# Allegro board pcb.brd
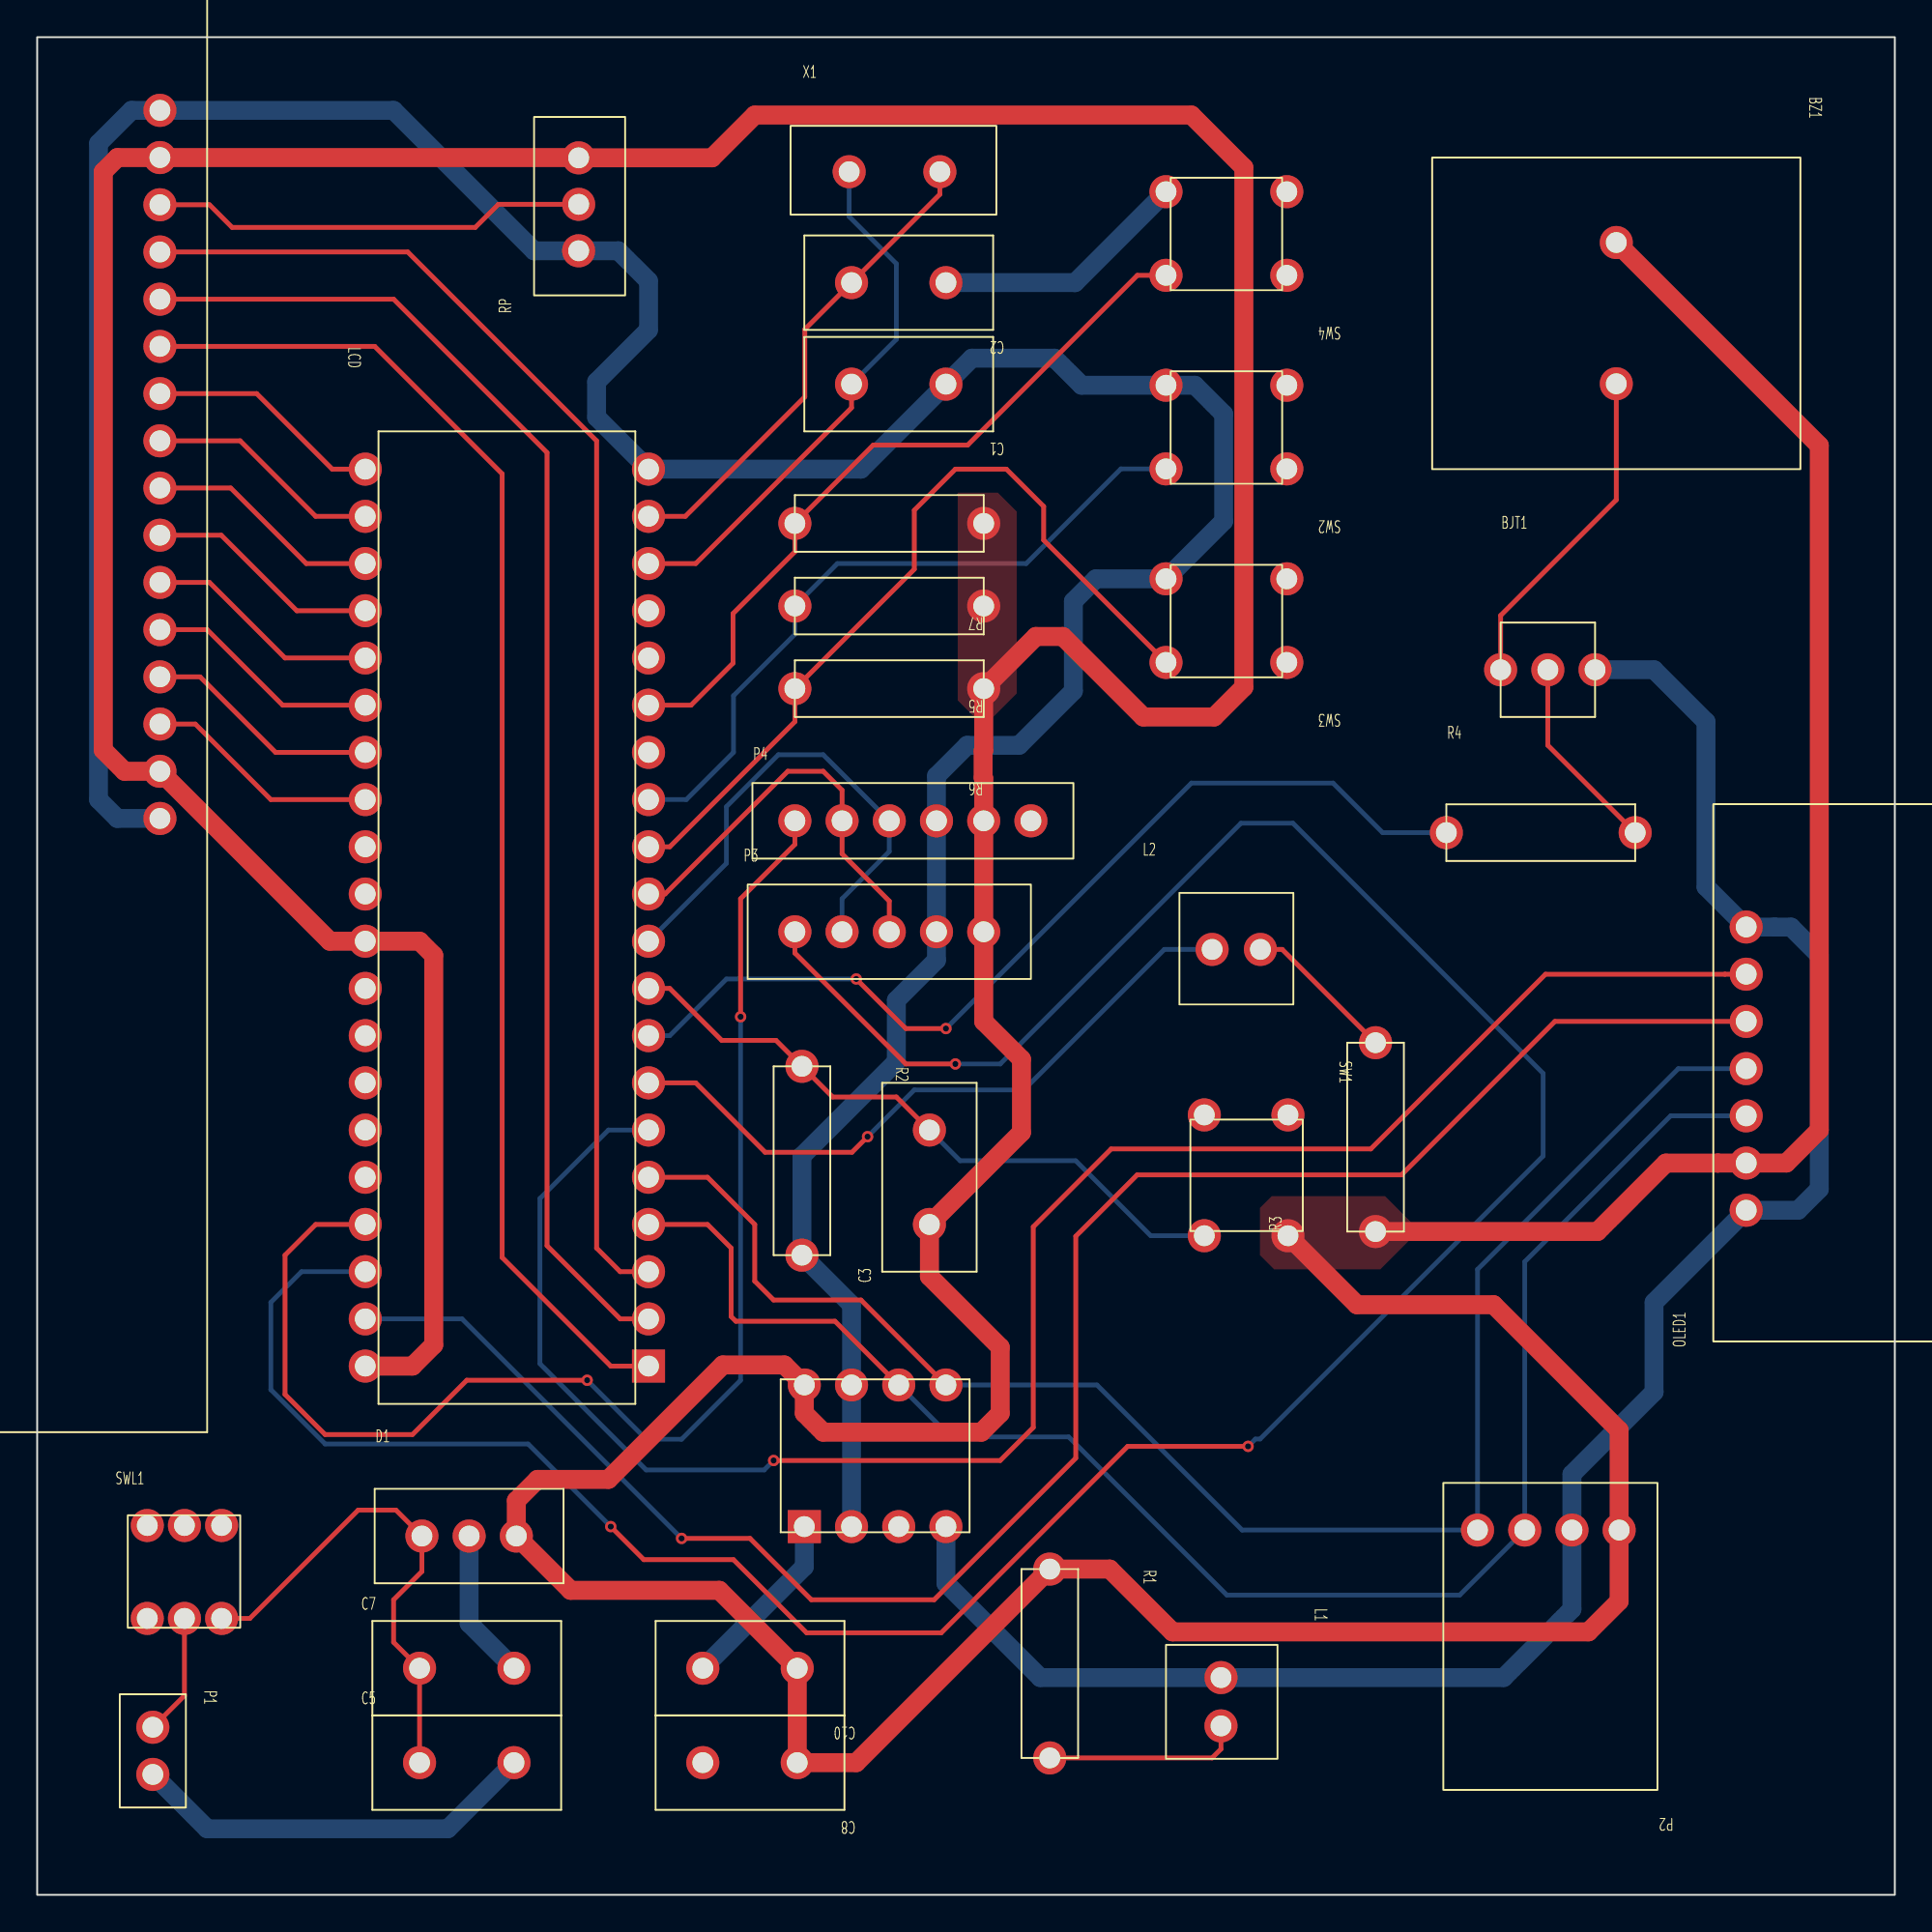
[diagram p0: board, top side]
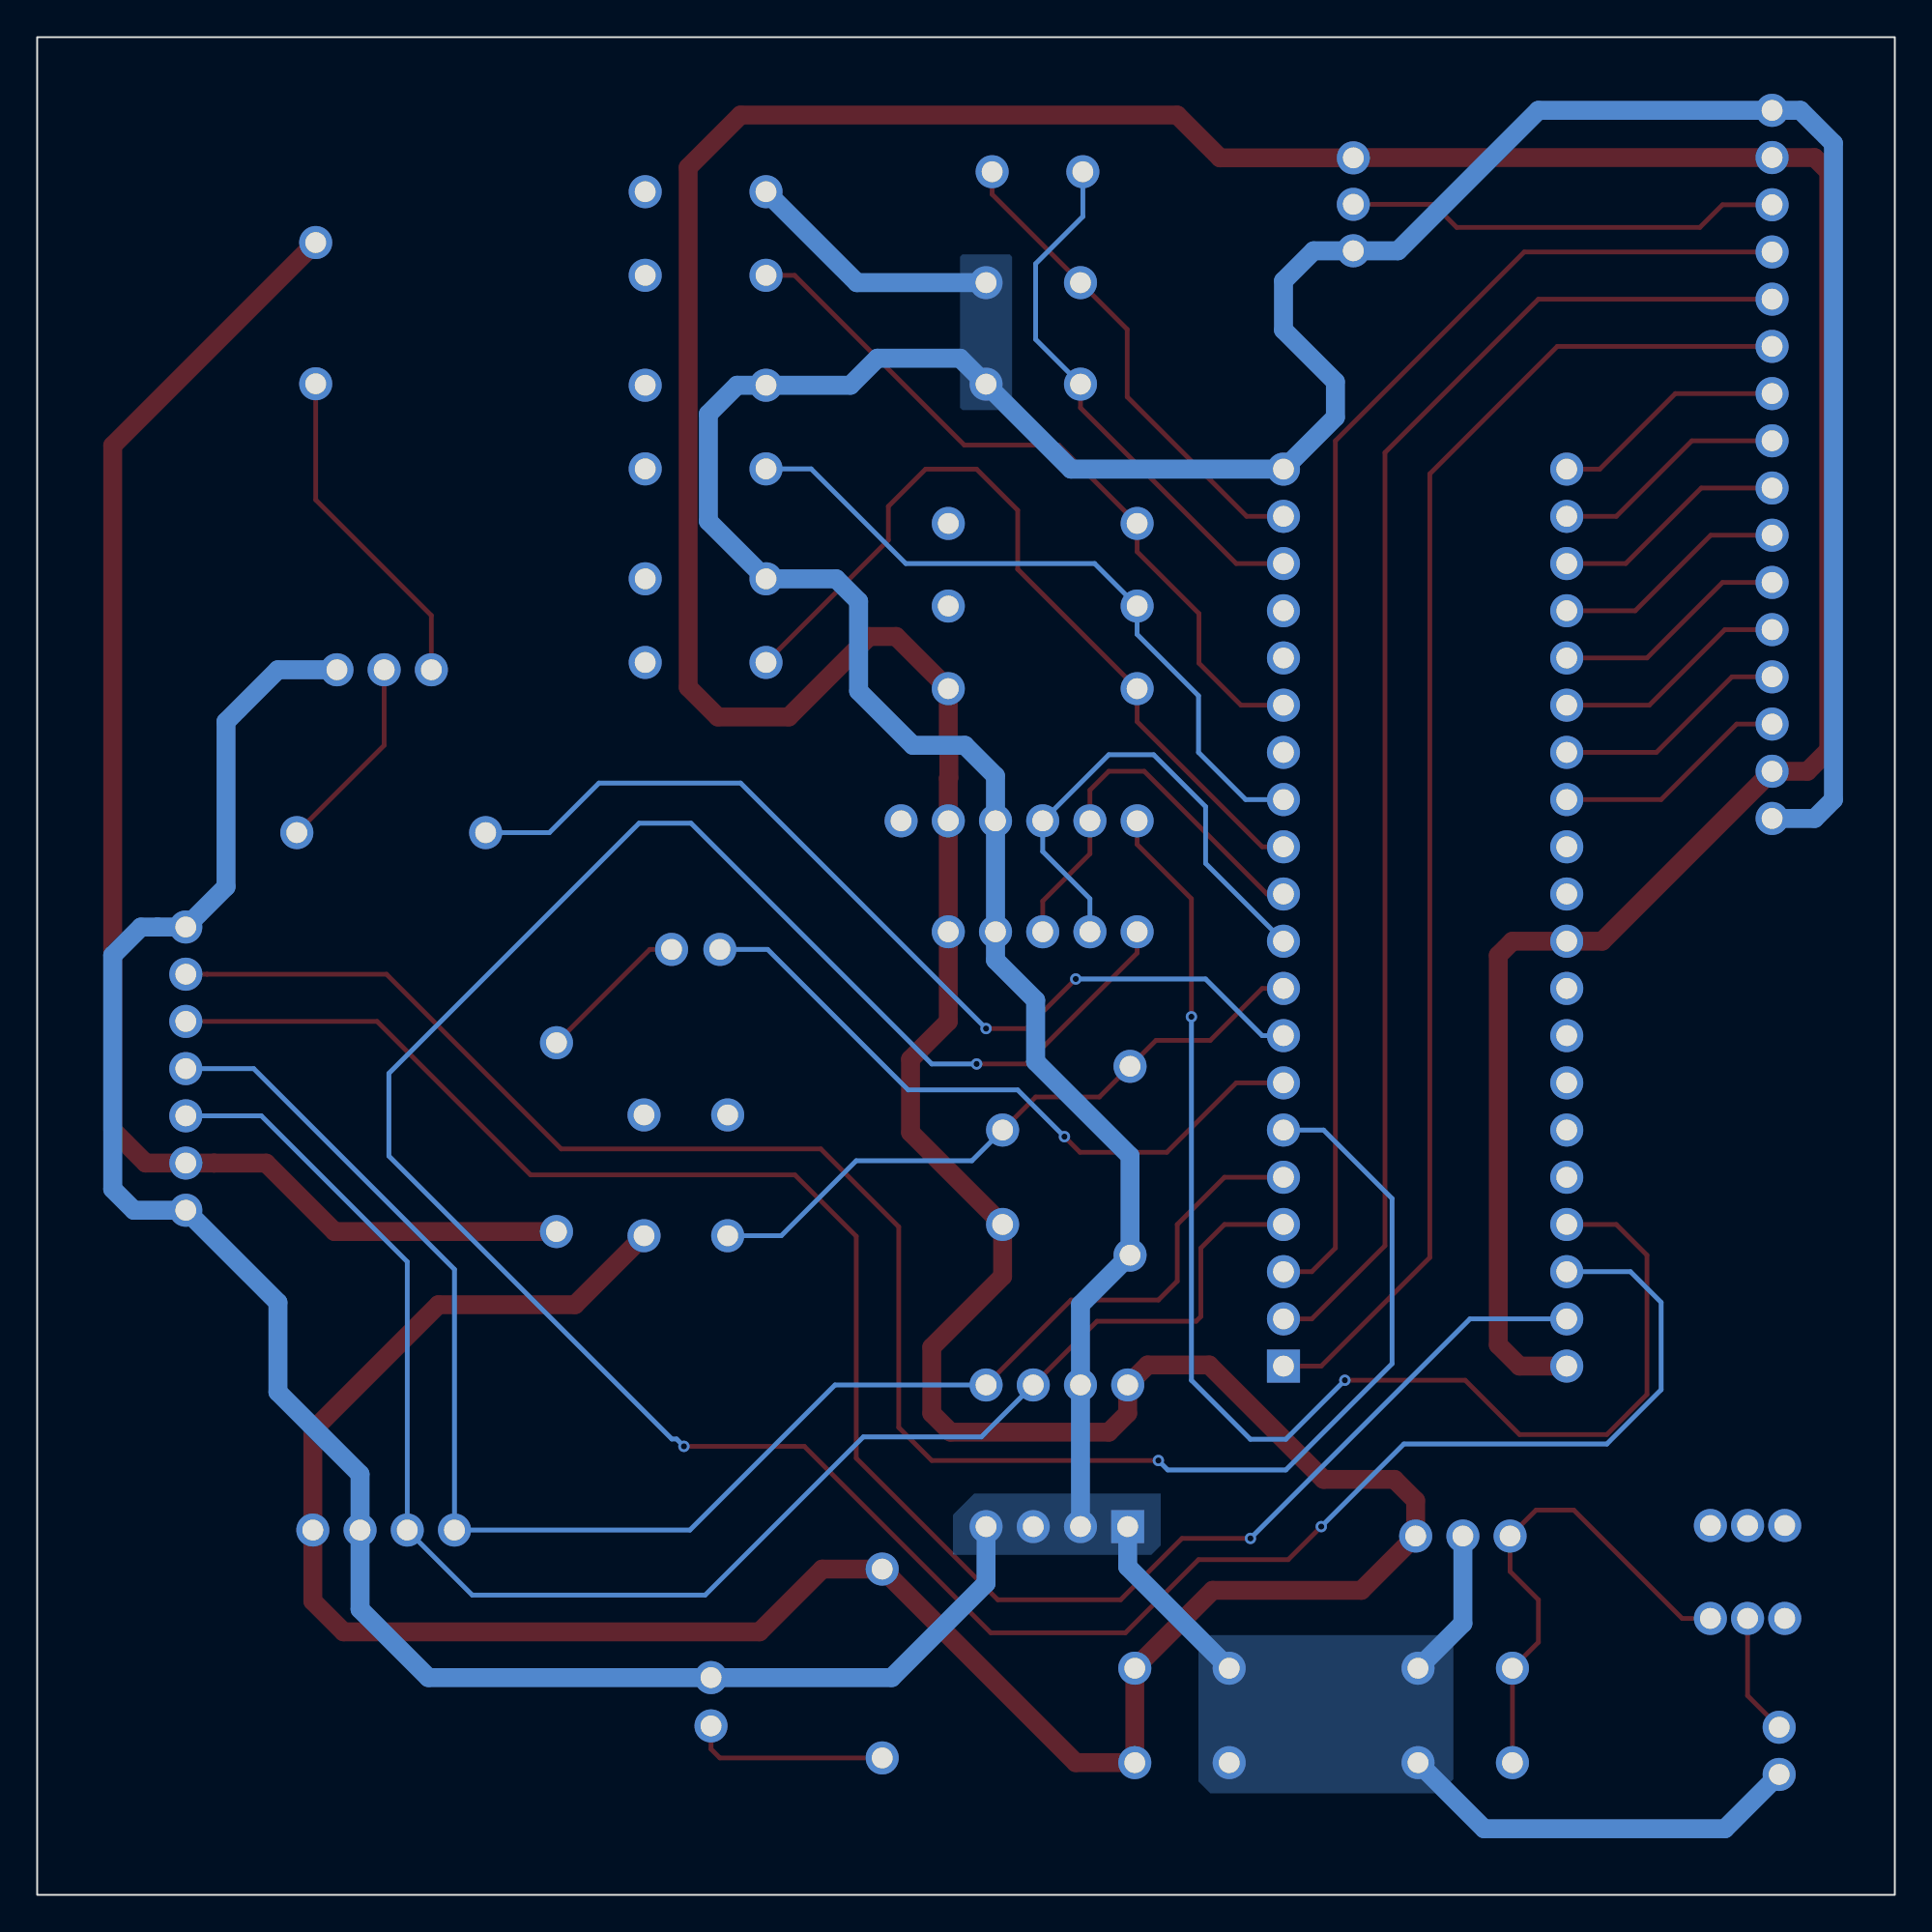
[diagram p1: board, bottom side, seen from below]

Outline 99.95 x 99.95 mm; copper layers: TOP, BOTTOM. Coordinates in mm from the lower left corner of the outline.
Outline path: rectangle 0,0 99.95,99.95

## Design rules (mm)
constraint set DEFAULT: min track width 0.127

## Placement (name value [footprint] x y rotation side)
AT1  -  [AT24C02]  45.08 23.62 90 top
BJT1  -  [BJT_PNP]  -139.7 -254.13 0 top
BZ1  -  [BUZZ]  84.96 85.09 270 top
C1  -  [CAPACITANCE]  46.35 81.28 180 top
C2  -  [CAPACITANCE]  46.35 86.74 180 top
C3  -  [CAPACITANCE]  48.01 38.61 90 top
C5  -  [CAPACITANCE]  23.11 7.11 0 top
C7  -  [CAPACITANCE]  23.11 12.19 0 top
C8  -  [CAPACITANCE]  38.35 7.11 180 top
C10  -  [CAPACITANCE]  38.35 12.19 180 top
D1  -  [L7805]  0.38 11.68 0 top
L1  -  [LED]  63.69 10.38 270 top
L2  -  [LED]  64.53 50.87 0 top
LCD  -  [LCD1602]  4.06 78.23 270 top
OLED1  -  [OLED]  104.93 44.32 90 top
P1  -  [SOCKET2]  6.22 7.75 270 top
P2  -  [MLX90614]  81.34 15.79 180 top
P3  -  [SOCKET5]  45.85 51.82 0 top
P4  -  [SOCKET6]  47.12 57.78 0 top
R1  -  [RESISTOR]  54.48 12.45 270 top
R2  -  [RESISTOR]  41.15 39.5 270 top
R3  -  [RESISTOR]  72.01 40.77 90 top
R4  -  [RESISTOR]  80.9 57.15 0 top
R5  -  [RESISTOR]  45.85 69.34 180 top
R6  -  [RESISTOR]  45.85 64.9 180 top
R7  -  [RESISTOR]  45.85 73.79 180 top
RP  -  [POTENTIOMETER]  29.13 90.96 90 top
SW1  -  [SWITCH]  65.1 38.66 270 top
SW2  -  [SWITCH]  63.94 78.92 180 top
SW3  -  [SWITCH]  63.94 68.51 180 top
SW4  -  [SWITCH]  63.94 89.34 180 top
SWL1  -  [SWITCH_LOCK]  7.92 17.42 0 top
U1  -  [DIP-40-100-600]  25.27 52.58 180 top
X1  -  [CRYSTAL]  46.23 92.71 0 top

## Library data of the parts
AT1 = AT24C02: part number: AT24C02-43010006,AT24C02
BJT1 = BJT_PNP: part number: BJT_PNP-15050001,BJT_PNP
BZ1 = BUZZ: part number: BUZZ-43010005,BUZZ
C1 C2 = CAPACITANCE: part number: CAPACITANCE-08070002,30P
C3 C5 C10 = CAPACITANCE: part number: CAPACITANCE-08070001,10U
C7 C8 = CAPACITANCE: part number: CAPACITANCE-08070004,0.1U
D1 = L7805: part number: L7805-43010004,L7805
L1 L2 = LED: part number: LED-15020001,LED
LCD = LCD1602: part number: LCD1602-15020001,LCD1602
OLED1 = OLED: part number: OLED-43010001,OLED
P1 = SOCKET2: part number: SOCKET2-14050003,SOCKET2
P2 = MLX90614: part number: MLX90614-43020001,MLX90614
P3 = SOCKET5: part number: SOCKET5-14050001,SOCKET5
P4 = SOCKET6: part number: SOCKET6-14050002,SOCKET6
R1 R3 = RESISTOR: part number: RESISTOR-07010004,330
R2 = RESISTOR: part number: RESISTOR-07010003,10K
R4-R7 = RESISTOR: part number: RESISTOR-07010001,1K
RP = POTENTIOMETER: part number: POTENTIOMETER-07080001,POTENTIOMETER
SW1-SW4 = SWITCH: part number: SWITCH-16100002,SWITCH
SWL1 = SWITCH_LOCK: part number: SWITCH_LOCK-16050001,SWITCH_LOCK
U1 = STC89C52: part number: STC89C52-41020001,STC89C52
X1 = CRYSTAL: part number: CRYSTAL-12010001,12.000MHZ

## Footprints (pads in the part's own frame, mm; a bottom-side part is the same pattern mirrored in y, then rotated)
AT24C02
  rect 1.778x1.778 hole 1.118: 1(-3.81,3.81)
  round 1.778 hole 1.118: 2(-3.81,1.27) 3(-3.81,-1.27) 4(-3.81,-3.81) 5(3.81,-3.81) 6(3.81,-1.27) 7(3.81,1.27) 8(3.81,3.81)
BJT_PNP
  round 1.778 hole 1.118: 1(218.44,320.04) 2(220.98,320.04) 3(223.52,320.04)
BUZZ
  round 1.778 hole 1.118: 1(-3.81,0) 2(3.79,0)
CAPACITANCE
  round 1.778 hole 1.118: 1(-2.54,0) 2(2.54,0)
CRYSTAL
  round 1.778 hole 1.118: 1(-2.54,0) 2(2.34,0)
DIP-40-100-600
  rect 1.778x1.778 hole 1.118: 1(-7.62,24.13)
  round 1.778 hole 1.118: 2(-7.62,21.59) 3(-7.62,19.05) 4(-7.62,16.51) 5(-7.62,13.97) 6(-7.62,11.43) 7(-7.62,8.89) 8(-7.62,6.35) 9(-7.62,3.81) 10(-7.62,1.27) 11(-7.62,-1.27) 12(-7.62,-3.81) 13(-7.62,-6.35) 14(-7.62,-8.89) 15(-7.62,-11.43) 16(-7.62,-13.97) 17(-7.62,-16.51) 18(-7.62,-19.05) 19(-7.62,-21.59) 20(-7.62,-24.13) 21(7.62,-24.13) 22(7.62,-21.59) 23(7.62,-19.05) 24(7.62,-16.51) 25(7.62,-13.97) 26(7.62,-11.43) 27(7.62,-8.89) 28(7.62,-6.35) 29(7.62,-3.81) 30(7.62,-1.27) 31(7.62,1.27) 32(7.62,3.81) 33(7.62,6.35) 34(7.62,8.89) 35(7.62,11.43) 36(7.62,13.97) 37(7.62,16.51) 38(7.62,19.05) 39(7.62,21.59) 40(7.62,24.13)
L7805
  round 1.778 hole 1.118: 1(20.32,7.62) 2(22.86,7.62) 3(25.4,7.62)
LCD1602
  round 1.778 hole 1.118: 1(-17.78,2.54) 2(-15.24,2.54) 3(-12.7,2.54) 4(-10.16,2.54) 5(-7.62,2.54) 6(-5.08,2.54) 7(-2.54,2.54) 8(0,2.54) 9(2.54,2.54) 10(5.08,2.54) 11(7.62,2.54) 12(10.16,2.54) 13(12.7,2.54) 14(15.24,2.54) 15(17.78,2.54) 16(20.32,2.54)
LED
  round 1.778 hole 1.118: 1(-1.31,0) 2(1.29,0)
MLX90614
  round 1.778 hole 1.118: 1(-3.78,-3.84) 2(-1.24,-3.84) 3(1.3,-3.84) 4(3.84,-3.84)
OLED
  round 1.778 hole 1.118: 1(-7.49,12.98) 2(-4.95,12.98) 3(-2.41,12.98) 4(0.13,12.98) 5(2.67,12.98) 6(5.21,12.98) 7(7.75,12.98)
POTENTIOMETER
  round 1.778 hole 1.118: 1(-2.5,0) 2(0,0) 3(2.5,0)
RESISTOR
  round 1.778 hole 1.118: 1(-5.08,0) 2(5.08,0)
SOCKET2
  round 1.778 hole 1.118: 1(-1.27,0) 2(1.27,0)
SOCKET5
  round 1.778 hole 1.118: 1(-5.08,0) 2(-2.54,0) 3(0,0) 4(2.54,0) 5(5.08,0)
SOCKET6
  round 1.778 hole 1.118: 1(-6.35,0) 2(-3.81,0) 3(-1.27,0) 4(1.27,0) 5(3.81,0) 6(6.35,0)
SWITCH
  round 1.778 hole 1.118: 1(-3.3,2.2) 2(3.2,2.2) 3(-3.3,-2.3) 4(3.2,-2.3)
SWITCH_LOCK
  round 1.778 hole 1.118: 1(-2,2.45) 2(0,2.45) 3(2,2.45) 4(-2,-2.55) 5(0,-2.55) 6(2,-2.55)

## Nets
3V3: P3.1 U1.38
GND: AT1.1 AT1.2 AT1.3 AT1.4 AT1.7(WP) BJT1.3 C1.1 C2.1 C5.2 C7.2 C8.2 C10.2 D1.2 L1.1 LCD.1 LCD.16 OLED1.1 OLED1.7 P1.2 P2.2 P3.4 P4.4 R2.2 RP.1 SW2.4 SW3.4 SW4.4 U1.20
VCC: AT1.8 BZ1.1 C3.1 C8.1 C10.1 D1.3(3/OUPUT) LCD.2 LCD.15 OLED1.2(VCC) P2.1(VCC) P3.5 P4.5(VCC) R1.1 R3.1 R5.1 R6.1 R7.1 RP.3 SW1.2 U1.31 U1.40
BUZZ: R4.1 U1.8
D0: LCD.7 U1.21
D1: LCD.8 U1.22
D2: LCD.9 U1.23
D3: LCD.10 U1.24
D4: LCD.11 U1.25
D5: LCD.12 U1.26
D6: LCD.13 U1.27
D7: LCD.14 U1.28
EN: P4.6
FUN: R7.2 SW4.2 U1.15
LCDE: LCD.6 U1.1
LED: L2.1 U1.7
RES: OLED1.5 U1.39
RS: LCD.4 U1.3
RST: C3.2 R2.1 SW1.4 U1.9
RW: LCD.5 U1.2
RXD: P3.2(TXD) P4.3 U1.10
SA: OLED1.6 U1.6
SCL: AT1.6 OLED1.3 P2.3 U1.4
SDA: AT1.5 OLED1.4 P2.4 U1.5
SET: R5.2 SW2.2 U1.13
STA: R6.2 SW3.2 U1.12
STATE: P4.1 U1.37
TXD: P3.3 P4.2 U1.11
UNNAMED_1_BJTPNP_I84_1: BJT1.1 BZ1.2(-)
UNNAMED_1_BJTPNP_I84_2: BJT1.2 R4.2
UNNAMED_1_CAPACITANCE_I46_1: C5.1 C7.1 D1.1 SWL1.6
UNNAMED_1_LCD1602_I59_VL: LCD.3(VL) RP.2(WIPER)
UNNAMED_1_LED_I33_2: L1.2 R1.2
UNNAMED_1_LED_I62_2: L2.2 R3.2
UNNAMED_1_SOCKET2_I54_V: P1.1(V+) SWL1.5
XTAL1: C2.2 U1.19 X1.2
XTAL2: C1.2 U1.18(XTAL2) X1.1

Pads without a net: SW1 1 3; SW2 1 3; SW3 1 3; SW4 1 3; SWL1 1 2 3 4; U1 14 16 17 29 30 32 33 34 35 36

## Via types
v1: diameter 0.61, hole 0.33, TOP to BOTTOM, 10 vias

## Routing (per net, layer and track width the routed paths; a pad name or vN(x,y) marks a point on that pad's centre or on a via; arc(x,y) is an arc through that point)
3V3: length 154.2
  TOP w0.254: v1(49.4,44.7) 46.74,44.7 40.77,50.67 40.77,51.82 ; v1(30.86,19.81) 32.64,18.03 37.47,18.03 41.4,14.1 48.64,14.1 58.67,24.13 v1(65.15,24.13)
  BOTTOM w0.254: v1(65.15,24.13) 65.55,24.53 65.8,24.53 81.03,39.75 81.03,44.2 67.56,57.66 64.77,57.66 51.82,44.7 v1(49.4,44.7) ; v1(30.86,19.81) 26.42,24.26 15.49,24.26 12.57,27.18 12.57,31.88 14.22,33.53 17.65,33.53
GND: length 354.8
  BOTTOM w1.016: C5.2 22.1,3.56 9.14,3.56 P1.2 ; 23.24,19.3 23.24,14.6 C7.2 ; C2.1 55.84,86.74 SW4.4 ; 41.28,19.81 41.28,17.65 C10.2 ; 43.81,19.81 43.81,31.75 R2.2 41.15,39.75 46.23,44.83 46.23,48.13 48.39,50.29 P4.4 48.39,60.2 50.04,61.85 52.83,61.85 55.75,64.77 55.75,69.6 56.96,70.81 SW3.4 63.84,73.91 63.84,79.67 62.29,81.22 SW2.4 56.19,81.22 54.74,82.68 50.29,82.68 C1.1 44.32,76.71 U1.20 30.1,79.5 30.1,81.41 32.89,84.2 32.89,86.83 31.27,88.46 RP.1 26.73,88.46 19.18,96.01 5.08,96.01 3.3,94.23 3.3,58.93 4.32,57.91 LCD.16 ; AT1.4 48.89,16.76 53.97,11.69 L1.1 78.9,11.69 82.58,15.37 P2.2 82.58,22.63 86.99,27.05 86.99,31.87 OLED1.1 94.75,36.83 95.89,37.97 95.89,50.55 94.36,52.07 93.48,52.07 93.48,52.07 OLED1.7 89.79,54.24 89.79,63.12 86.99,65.91 BJT1.3
VCC: length 448.8
  TOP w1.016: BZ1.1 95.89,77.98 95.89,41.15 94.11,39.37 OLED1.2 90.43,39.37 90.43,39.37 87.63,39.37 83.95,35.69 R3.1 ; SW1.2 71.01,31.75 78.36,31.75 85.12,24.99 P2.1 85.12,15.8 83.46,14.15 61.09,14.15 57.71,17.53 54.48,17.53 44.07,7.11 C8.1 C10.1 36.7,16.38 28.7,16.38 D1.3 25.78,21.21 26.92,22.35 30.73,22.35 36.89,28.51 40.2,28.51 41.28,27.43 41.28,25.91 42.29,24.89 50.8,24.89 51.82,25.91 51.82,29.46 48.01,33.27 C3.1 52.96,41.02 52.96,44.96 50.93,46.99 P3.5 P4.5 50.93,60.07 50.9,60.1 50.9,61.54 50.93,61.57 R6.1 53.73,67.7 55.18,67.7 59.51,63.37 63.32,63.37 64.92,64.97 64.92,92.94 62.1,95.76 38.61,95.76 36.31,93.46 RP.3 29.12,93.47 LCD.2 4.32,93.47 3.56,92.71 3.56,61.59 4.7,60.45 LCD.15 15.75,51.31 U1.31 20.57,51.31 21.34,50.55 21.34,29.59 20.19,28.45 U1.40
BUZZ: length 51.9
  TOP w0.254: v1(48.89,46.61) 46.74,46.61 v1(44.07,49.28)
  BOTTOM w0.254: 32.89,46.23 34.04,46.23 37.08,49.28 v1(44.07,49.28) ; v1(48.89,46.61) 62.1,59.82 69.72,59.82 72.39,57.15 R4.1
D0: length 12.7
  TOP w0.254: U1.21 15.88,76.71 11.81,80.77 LCD.7
D1: length 12.7
  TOP w0.254: LCD.8 10.92,78.23 14.99,74.17 17.65,74.17
D2: length 12.7
  TOP w0.254: 6.6,75.69 10.41,75.69 14.48,71.63 U1.23
D3: length 12.7
  TOP w0.254: LCD.10 9.91,73.15 13.97,69.09 U1.24
D4: length 12.7
  TOP w0.254: LCD.11 9.27,70.61 13.33,66.55 U1.25
D5: length 12.7
  TOP w0.254: 6.6,68.07 9.14,68.07 13.21,64.01 U1.26
D6: length 12.7
  TOP w0.254: 17.65,61.47 12.83,61.47 8.76,65.53 LCD.13
D7: length 12.7
  TOP w0.254: 6.6,62.99 8.51,62.99 12.57,58.93 U1.28
FUN: length 39.9
  TOP w0.254: U1.15 35.18,64.01 37.44,66.27 37.44,68.94 40.77,72.26 40.77,73.79 44.98,78 50.06,78 59.2,87.14 SW4.2
LCDE: length 73.7
  TOP w0.254: 6.6,83.31 18.16,83.31 25.02,76.45 25.02,34.29 30.86,28.45 U1.1
LED: length 36.4
  TOP w0.254: v1(44.68,40.79) 43.84,39.95 39.17,39.95 35.43,43.69 U1.7
  BOTTOM w0.254: L2.1 60.65,50.87 53.09,43.31 47.19,43.31 v1(44.68,40.79)
RES: length 100.4
  TOP w0.254: v1(34.67,19.18) 38.35,19.18 41.66,15.88 48.26,15.88 55.88,23.5 55.88,35.43 59.18,38.74 73.4,38.74 81.66,46.99 OLED1.5
  BOTTOM w0.254: v1(34.67,19.18) 22.86,30.99 17.65,30.99
RS: length 74.5
  TOP w0.254: LCD.4 19.94,88.39 30.1,78.23 30.1,34.8 31.37,33.53 32.89,33.53
RST: length 35.4
  TOP w0.254: 48.01,41.15 46.23,42.93 42.8,42.93 R2.1 39.75,45.97 36.83,45.97 34.04,48.77 U1.9
  BOTTOM w0.254: SW1.4 59.91,35.46 55.88,39.5 49.66,39.5 48.01,41.15
RW: length 74
  TOP w0.254: LCD.5 19.18,85.85 27.43,77.6 27.43,34.92 31.37,30.99 32.89,30.99
RXD: length 27.4
  BOTTOM w0.254: P3.2 43.31,53.59 45.85,56.13 P4.3 42.29,61.34 39.88,61.34 37.08,58.55 37.08,55.5 U1.10
SA: length 100.9
  TOP w0.254: OLED1.6 90.81,49.53 90.81,49.53 81.15,49.53 71.75,40.13 57.78,40.13 53.59,35.94 53.59,25.15 51.82,23.37 v1(39.62,23.37)
  BOTTOM w0.254: v1(39.62,23.37) 39.12,22.86 32.77,22.86 27.05,28.57 27.05,37.46 30.73,41.15 U1.6
SCL: length 88.6
  TOP w0.254: U1.4 36.07,36.07 37.34,34.8 37.34,31.11 37.59,30.86 42.93,30.86 AT1.6
  BOTTOM w0.254: AT1.6 49.15,24.64 55.5,24.64 64.01,16.13 76.54,16.13 P2.3 80.04,34.06 87.89,41.91 OLED1.3
SDA: length 87.2
  TOP w0.254: 32.89,38.61 36.07,38.61 38.61,36.07 38.61,33.02 39.62,32 44.32,32 AT1.5
  BOTTOM w0.254: AT1.5 57.02,27.43 64.83,19.63 P2.4 77.5,33.65 88.3,44.45 OLED1.4
SET: length 37.9
  BOTTOM w0.254: SW2.2 58.31,76.72 53.21,71.63 43.05,71.63 40.77,69.34 40.77,67.82 37.47,64.52 37.47,61.47 34.92,58.93 U1.13
STA: length 44.5
  TOP w0.254: U1.12 34.04,56.39 40.77,63.12 40.77,64.9 47.19,71.32 47.19,74.5 49.4,76.71 52.15,76.71 54.15,74.7 54.15,72.89 SW3.2
STATE: length 73
  TOP w0.254: U1.37 14.99,36.07 13.33,34.42 13.33,26.92 15.49,24.76 20.19,24.76 23.11,27.69 v1(29.59,27.69) ; v1(37.85,47.24) 37.85,53.59 40.77,56.51 P4.1
  BOTTOM w0.254: v1(29.59,27.69) 32.77,24.51 34.67,24.51 37.85,27.69 v1(37.85,47.24)
TXD: length 22.2
  TOP w0.254: 32.89,53.85 33.78,53.85 40.39,60.45 42.29,60.45 43.31,59.44 P4.2 43.31,56.01 45.85,53.47 P3.3
UNNAMED_1_BJTPNP_I84_1: length 18
  TOP w0.254: BJT1.1 78.74,68.83 84.96,75.06 BZ1.2
UNNAMED_1_BJTPNP_I84_2: length 10.7
  TOP w0.254: 85.98,57.15 81.28,61.85 BJT1.2
UNNAMED_1_CAPACITANCE_I46_1: length 27.2
  TOP w0.254: SWL1.6 11.44,14.87 17.27,20.7 19.3,20.7 D1.1 20.7,17.4 19.18,15.88 19.18,13.59 C7.1 C5.1
UNNAMED_1_LCD1602_I59_VL: length 23.6
  TOP w0.254: 6.6,90.93 9.27,90.93 10.49,89.71 23.57,89.71 24.81,90.96 RP.2
UNNAMED_1_LED_I33_2: length 10.7
  TOP w0.254: R1.2 63.22,7.37 63.69,7.84 L1.2
UNNAMED_1_LED_I62_2: length 8.3
  TOP w0.254: L2.2 66.99,50.87 R3.2
UNNAMED_1_SOCKET2_I54_V: length 6.6
  TOP w0.254: P1.1 7.92,10.72 SWL1.5
XTAL1: length 26.2
  TOP w0.254: X1.2 48.57,91.49 C2.2 41.3,84.23 41.3,80.59 34.87,74.17 32.89,74.17
XTAL2: length 29.1
  TOP w0.254: U1.18 35.43,71.63 43.81,80.01 C1.2
  BOTTOM w0.254: X1.1 43.69,90.3 46.23,87.76 46.23,83.69 C1.2

## Copper pours and planes (outline as drawn; the poured copper is in the pictures)
GND on BOTTOM: 47.5,88.14 47.5,80.01 47.62,79.88 50.16,79.88 50.29,80.01 50.29,88.14 50.16,88.26 47.62,88.26
GND on BOTTOM: 39.5,21.59 39.5,18.8 40,18.29 50.67,18.29 50.67,20.45 49.53,21.59
GND on BOTTOM: 24,13.97 36.83,13.97 37.47,13.33 37.47,6.1 36.83,5.46 24.51,5.46 23.75,6.22 23.75,13.72
VCC on TOP: 49.53,75.44 49.53,64.26 50.67,63.12 51.18,63.12 52.7,64.64 52.7,74.42 51.69,75.44
VCC on TOP: 65.79,36.96 65.79,34.42 66.55,33.66 72.26,33.66 74.17,35.56 74.17,35.94 72.52,37.59 66.42,37.59
